# Altium PCB PCB.PcbDoc
Units mil, origin at the board's own origin, x right, y up, seen from the top; angles counter-clockwise.
Board outline 1574.8 x 2165.35 mil, 2 copper layers (Top Layer, Bottom Layer); 11 components, 17 nets, 47 pads, 22 vias.
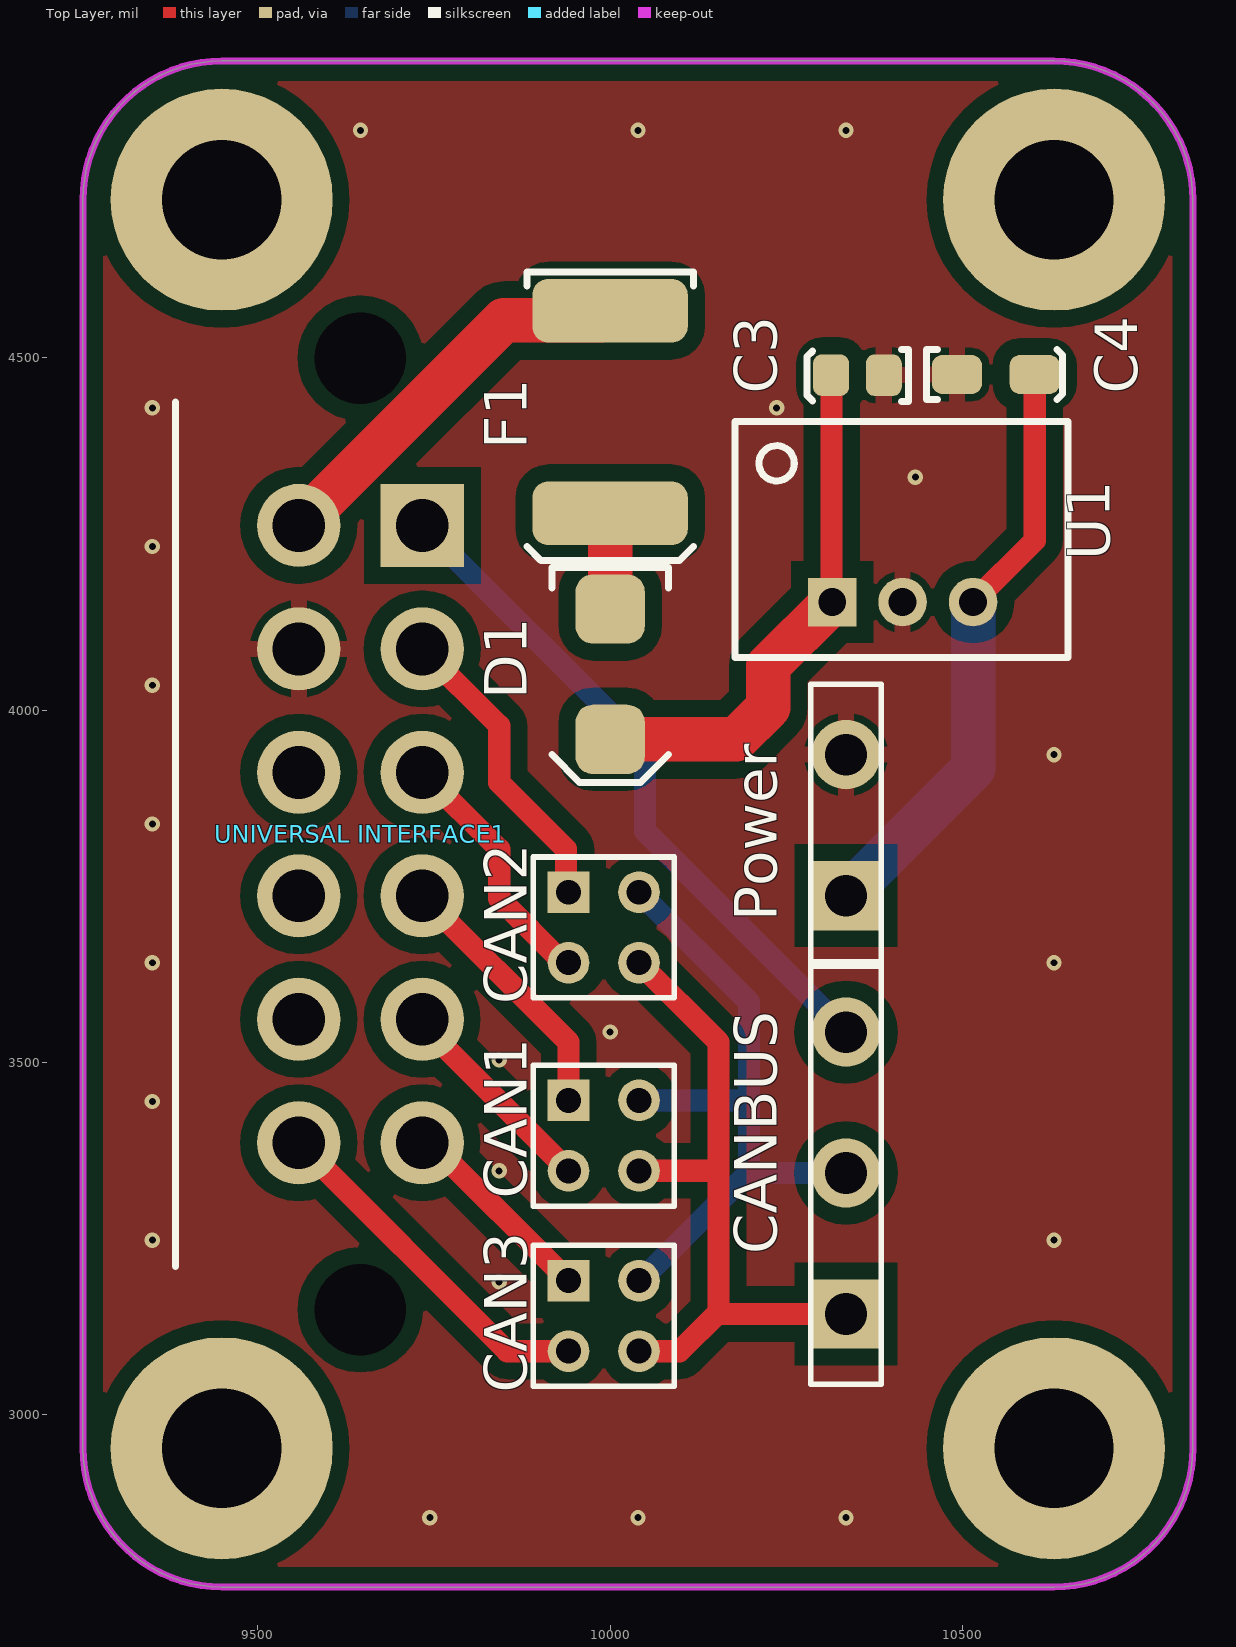
[diagram p0: Top Layer view]
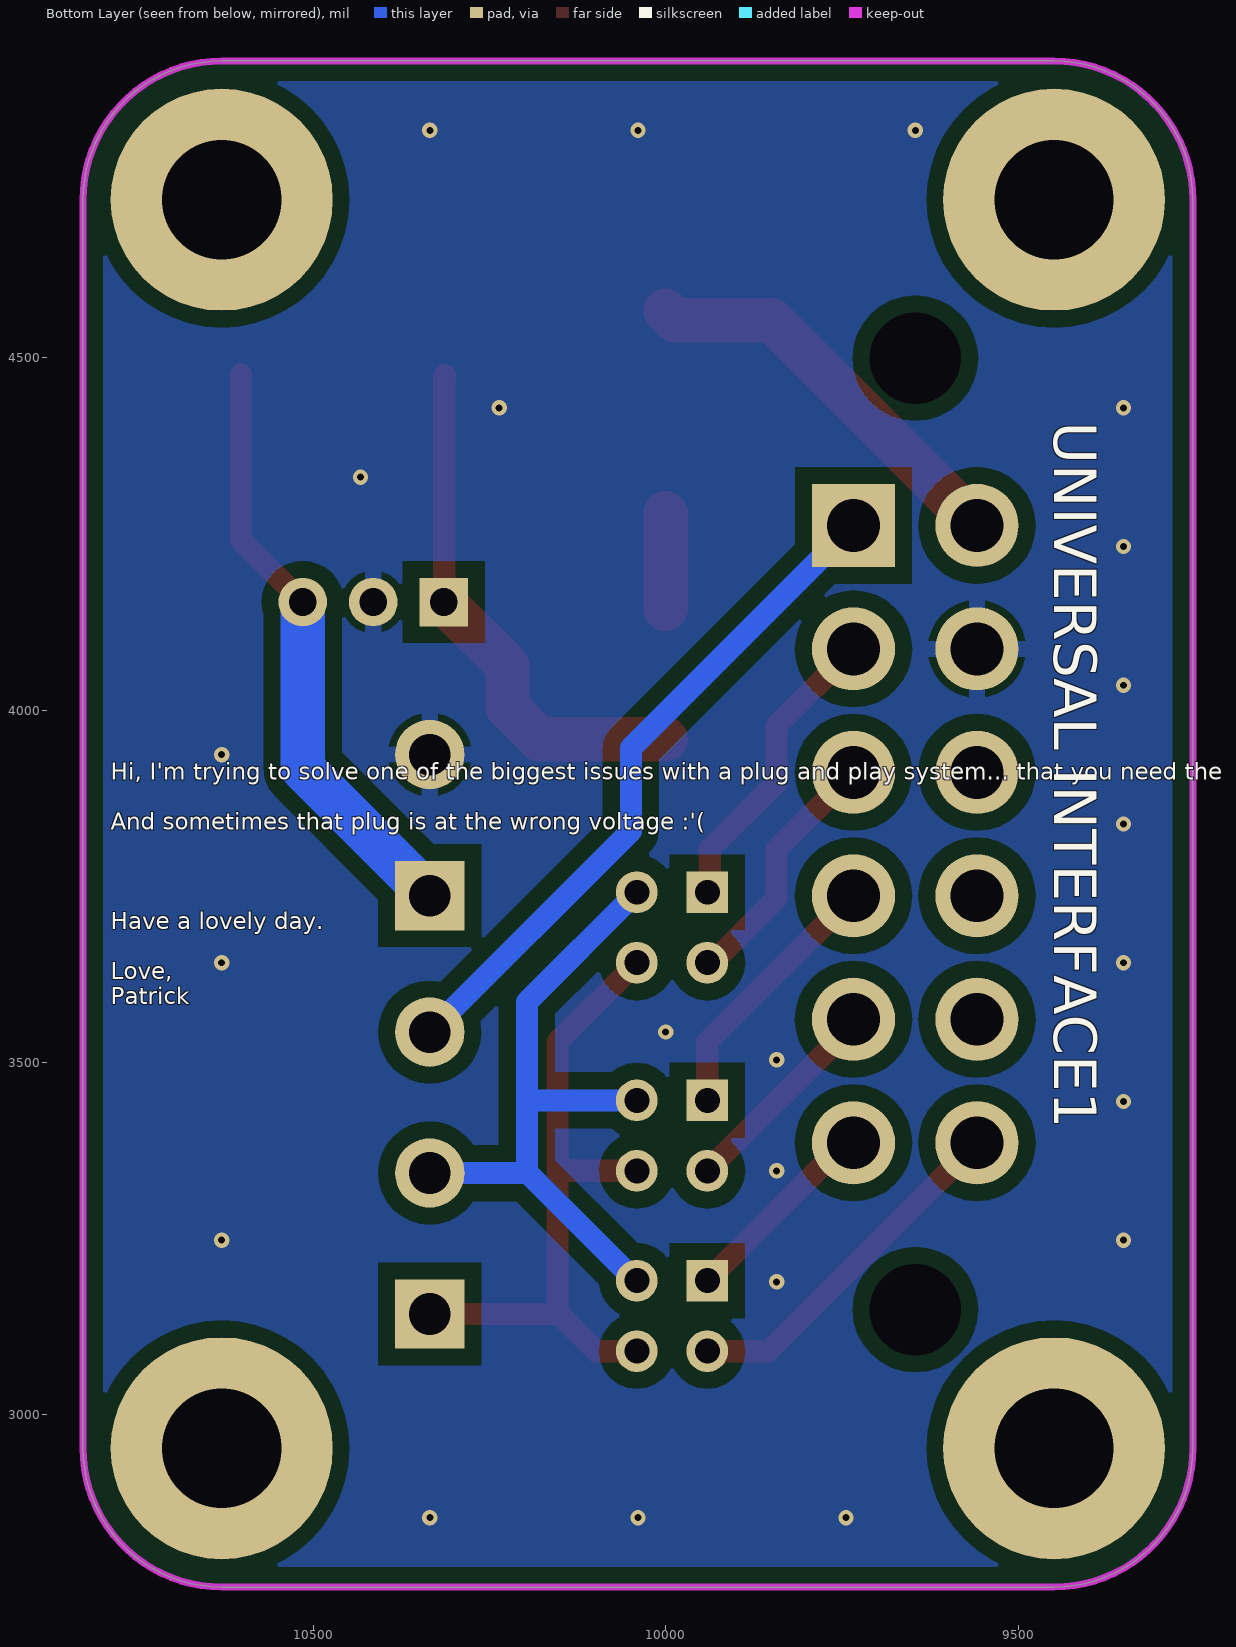
[diagram p1: Bottom Layer view, seen from below]

## Layer stack, top to bottom
Top Solder: solder mask 0.4, Solder Resist, Dk 3.5
Top Layer: signal copper 1.4
Dielectric 1: dielectric 12.6, FR-4, Dk 4.8
Bottom Layer: signal copper 1.4
Bottom Solder: solder mask 0.4, Solder Resist, Dk 3.5

## Board outline
9251.97,2952.76 9251.97,4724.41 cw(c9448.82,4724.41) 9448.82,4921.26 10629.92,4921.26 cw(c10629.92,4724.41) 10826.77,4724.41 10826.77,2952.76 cw(c10629.92,2952.76) 10629.92,2755.91 9448.82,2755.91 cw(c9448.82,2952.76)

## Design rules (kind name [scope] priority, off if disabled: settings)
Clearance [All] p1: gap=10 ignorepadtopadclearanceinfootprint=FALSE except(0: Arc-Hole Track-Hole SMDPad-Hole THPad-Hole Via-Hole Fill-Hole Poly-Hole Region-Hole Text-Hole; 3.94: THPad-THPad; 6: Arc-SMDPad Track-SMDPad SMDPad-SMDPad; 7.87: Arc-THPad Track-THPad SMDPad-THPad THPad-Via; 8: Arc-Arc Arc-Track Arc-Region Track-Track Track-Region SMDPad-Region THPad-Region Via-Region Fill-Region Poly-Region Region-Region; 23.62: Arc-Poly Track-Poly SMDPad-Poly THPad-Poly Via-Poly Fill-Poly Poly-Poly)
Height [All] p1: minheight=0 maxheight=1968.5 prefheight=500
HoleSize [All] p1: absolutevalues=TRUE maxlimit=393.7 minlimit=1 maxpercent=80.000 minpercent=20.000
PlaneClearance [All] p1: clearance=15.75
PlaneConnect [All] p1: pad.planeconnectstyle=Relief pad.reliefexpansion=20 pad.reliefentries=4 pad.reliefconductorwidth=31.5 pad.reliefairgap=10 via.planeconnectstyle=Direct via.reliefexpansion=20 via.reliefentries=4 via.reliefconductorwidth=31.5 via.reliefairgap=10
PolygonConnect [All] p1: thpad.connectstyle=Relief thpad.reliefconductorwidth=23.62 thpad.reliefentries=4 thpad.polygonreliefangle="90 Angle" thpad.airgapwidth=10 smdpad.connectstyle=Relief smdpad.reliefconductorwidth=23.62 smdpad.reliefentries=4 smdpad.polygonreliefangle="90 Angle" smdpad.airgapwidth=10 via.connectstyle=Direct via.reliefconductorwidth=23.62 via.reliefentries=4 via.polygonreliefangle="90 Angle" via.airgapwidth=10
RoutingVias [All] p1: holewidth=28 width=50 viastyle="Through Hole" minholewidth=8 minwidth=10 maxholewidth=28 maxwidth=50
SolderMaskExpansion [All] p1: expansion=2
Width [All] p1: maxlimit=118.11 minlimit=5 preferedwidth=19.68
26 further rules are at their usual default settings.

## Components (designator, comment, footprint, x,y, rotation, side; value= is the part's Value field where it differs from the comment)
C3 "10uF" 0805 10350.39,4474.41 r180 top
C4 "22uF" 1206 10594.49,4476.38 r0 top
CAN1 "2.54mm" "TH 2.54mm Header 2x2" 9940.94,3446.46 r270 top
CAN2 "2.54mm" "TH 2.54mm Header 2x2" 9940.94,3741.73 r270 top
CAN3 "2.54mm" "TH 2.54mm Header 2x2" 9940.94,3190.55 r270 top
CANBUS "5.08mm" "TH 5.08mm Header 1x3" 10334.65,3143.31 r90 top
D1 "SD560BTR" "SMB Diode" 10000,4133.86 r270 top
F1 "0ZCF0100AF2A" 2920 10000,4566.93 r270 top
Power "5.08mm" "TH 5.08mm Header 1x2" 10334.65,3737.01 r90 top
U1 "R-78C5.0-1.0" "RECOM 3-SIP" 10314.96,4153.54 r0 top
"UNIVERSAL INTERFACE1" "DTF13-12P" DTF13-12P 9558.27,3824.61 r270 top

## Footprints (in the part's own frame and the unit in brackets; to place one, negate y for a bottom-side part, rotate by r counter-clockwise, add the part's x,y. Pads: shape width x height; smd on the part's side, far side on the other; paste and mask are expansions set on the pad)
0805 [mil]
  rrect50% 51.18x59.06 smd: 1(-37.87,-1.03) 2(36.93,-1.03)
  silkscreen extent -73,-37 71,37, body extent -39,-26 39,26, height 29
1206 [mm]
  rrect50% 1.8x1.4 smd: 1(-2.6,0) 2(0.2,0)
  silkscreen extent -3.7,-0.9 1.2,0.9, body extent -2.9,-0.9 0.5,0.9, height 1.85
2920 [mm]
  rrect50% 2.3x5.6 smd: 1(0,0) 2(7.3,0)
  silkscreen extent -1.4,-3 9,3, body extent -0.34,-2.81 7.64,2.81, height 1.14
DTF13-12P [mm]
  round 3 hole 3.3 unplated: 0(-17.145,2.22) 0(17.145,2.22)
  rect 3x3 hole 1.9: 1(-11.114,4.45)
  round 3 hole 1.9: 2(-6.664,4.45) 3(-2.214,4.45) 4(2.236,4.45) 5(6.686,4.45) 6(11.136,4.45) 7(11.136,0) 8(6.686,0) 9(2.236,0) 10(-2.214,0) 11(-6.664,0) 12(-11.114,0)
  silkscreen extent -15.56,-4.45 15.59,-4.45, body extent -20.79,-27.74 20.79,6.55, height 23.13
"RECOM 3-SIP" [mm] "12 to 42 Vdc In, 9 Vdc Out"
  rect 1.75x1.75 hole 1: 1(0,0)
  round 1.75 hole 1: 2(2.54,0) 3(5.08,0)
  silkscreen extent -3.5,-2 8.5,6.5, body extent -3.26,-2.02 8.34,6.48, height 11.41
"SMB Diode" [mm]
  rrect50% 2.5x2.5 smd: A(-0.25,0) K(4.45,0)
  silkscreen extent -1.75,-2.1 6,2.1, body extent -0.69,-1.97 4.9,1.97, height 2.5
"TH 2.54mm Header 2x2" [mm]
  rect 1.5x1.5 hole 0.9: 1(0,0)
  round 1.5 hole 0.9: 2(0,2.54) 3(2.54,0) 4(2.54,2.54)
  silkscreen extent -1.27,-1.27 3.81,3.81, body extent -1.27,-1.27 3.81,3.81, height 9.5
"TH 5.08mm Header 1x2" [mm]
  rect 2.5x2.5 hole 1.5: 1(0,0)
  round 2.5 hole 1.5: 2(5.08,0)
  silkscreen extent -2.54,-1.27 7.62,1.27, body extent -2.54,-3.98 7.61,4.02, height 10
"TH 5.08mm Header 1x3" [mm]
  rect 2.5x2.5 hole 1.5: 1(0,0)
  round 1.8 hole 1.2: 2(5.08,0)
  round 2.5 hole 1.5: 2(5.08,0) 3(10.16,0)
  silkscreen extent -2.54,-1.27 12.7,1.27, body extent -2.57,-4 12.58,4, height 10

## Part data
C3: library part GRM21BR6YA106KE43L, Digikey Part Number=490-10514-6-ND, Manufacturer=muRata, Rated Voltage=50V, Tolerance=10%, Material=X5R, Part Number=GRM21BR6YA106KE43L
C4: library part CC1206MKX5R7BB226, Digikey Part Number=311-1997-2-ND, Manufacturer=YAGEO, Rated Voltage=16V, Tolerance=20%, Material=Ceramic, Part Number=CC1206MKX5R7BB226
CAN1 CAN2 CAN3: library part "TH 2.54mm Header 2x2", Angle=0, Contact=NA, Flange=No, Part Number="TH 2.54mm Header 2x2", Pitch=2.54mm, Positions=4, Row Spacing=2.54mm
CANBUS: library part 1760520000, Digikey Part Number=281-1883-ND, Angle=0, Contact=NA, Digikey Link=https://www.digikey.com.au/product-detail/en/weidm%C3%BCller/1760520000/281-1883-ND/459740, Flange=No, Part Number=1760520000, Pitch=5.08mm, Positions=3, Row Spacing=0
D1: "1.2V_F 600V 5A SMB", Digikey Part Number=1655-1530-2-ND, Manufacturer="SMC Diode Solutions", Digikey Link=https://www.digikey.com/product-detail/en/smc-diode-solutions/SD560BTR/1655-1530-2-ND/6022620, Part Number=SD560BTR
F1: "PTC RESET FUSE 60V 1A 292", Digikey Part Number=507-2070-1-ND, Manufacturer="Littelfuse Inc.", Digikey Link=https://www.digikey.com/product-detail/en/bel-fuse-inc/0ZCF0100AF2A/507-2070-1-ND/6210547, Part Number=0ZCF0100AF2A
Power: library part 1760510000, Digikey Part Number=281-1882-ND, Angle=0, Contact=NA, Digikey Link=https://www.digikey.com.au/product-detail/en/weidm%C3%BCller/1760510000/281-1882-ND/459739, Flange=No, Part Number=1760510000, Pitch=5.08mm, Positions=2, Row Spacing=0
U1: "CONV DC/DC 1A 5V OUT SIP VERT", Digikey Part Number=945-1395-5-ND, Manufacturer=Recom, Digikey Link=https://www.digikey.com.au/product-detail/en/recom-power/R-78C5.0-1.0/945-1395-5-ND/2652148, Isolation=Non-Isolated, Part Number=R-78C5.0-1.0
"UNIVERSAL INTERFACE1": library part DTF13-12P[[/\]]DTF13-12P, Digikey Part Number=1734-1861-ND, Angle=90, Contact="Copper Alloy", Digikey Link=https://www.digikey.com/products/en?keywords=dtf13-12pa, Flange=No, Part Number=DTF13-12P, Pitch=4.45mm, Positions=12, Row Spacing=4.45mm

## Free pads (board coordinates)
  round 314.96 hole 169.29 unplated: 0(9448.82,2952.76) 0(9448.82,4724.41) 0(10629.92,2952.76) 0(10629.92,4724.41)

## Via types
v1: diameter 21.65, hole 9.84, Top Layer to Bottom Layer, 22 vias

## Nets (pads, with @x,y where several pads share a name; then routed paths per layer and width w, separated by ;. In a path a pad name is that pad's centre, name@x,y a point inside that pad or via, vN(x,y) a via of type N, cw(c..) or ccw(c..) an arc to the next point about the centre after c; other vN are vias at no path point)
5kW: "UNIVERSAL INTERFACE1.8"
5V: C4.2 Power.1 U1.3 | length 850.3
  Top Layer w31.5: U1.3 10602.36,4240.94 C4.2
  Bottom Layer w62.99: Power.1 10514.96,3917.32 U1.3
12V/24V: C3.2 D1.K U1.1 | length 752.8
  Top Layer w31.5: C3.2 10314.21,4474.69 10314.21,4154.29 U1.1
  Top Layer w62.99: D1.K 10179.13,3958.66 10224.35,4003.88 10224.35,4062.93 U1.1
CAN1H: "UNIVERSAL INTERFACE1.5" CAN1.3 | length 300.9
  Top Layer w31.5: 9733.46,3561.38 9733.46,3553.94 CAN1.3
CAN1L: "UNIVERSAL INTERFACE1.4" CAN1.1 | length 376.1
  Top Layer w31.5: 9733.46,3736.57 9940.94,3529.09 CAN1.1
CAN2H: "UNIVERSAL INTERFACE1.3" CAN2.3 | length 360.3
  Top Layer w31.5: 9733.46,3911.77 9842.52,3802.72 9842.52,3732.7 9933.49,3641.73 CAN2.3
CAN2L: "UNIVERSAL INTERFACE1.2" CAN2.1 | length 431.2
  Top Layer w31.5: 9733.46,4086.97 9842.52,3977.91 9842.52,3897.64 9937.4,3802.76 9937.4,3745.28 CAN2.1
CAN3H: "UNIVERSAL INTERFACE1.7" CAN3.3 | length 505.1
  Top Layer w31.5: 9558.27,3386.18 9853.9,3090.55 CAN3.3
CAN3L: "UNIVERSAL INTERFACE1.6" CAN3.1 | length 288.5
  Top Layer w31.5: 9733.46,3386.18 9745.31,3386.18 CAN3.1
CANH: CAN1.4 CAN2.4 CAN3.4 CANBUS.1 | length 974.4
  Top Layer w31.5: CAN3.4 10098.43,3090.55 10153.54,3145.67 ; CAN1.4 10149.61,3346.46 10153.54,3350.39 ; CAN2.4 10153.54,3529.13 10153.54,3350.39 ; CANBUS.1 10155.91,3143.31 10153.54,3145.67 ; 10153.54,3145.67 10153.54,3350.39
CANL: CAN1.2 CAN2.2 CAN3.2 CANBUS.2 | length 976.7
  Bottom Layer w31.5: CAN3.2 10042.91,3190.55 10196.85,3344.49 ; CAN1.2 10194.49,3446.46 10196.85,3448.82 ; CAN2.2 10196.85,3585.83 10196.85,3448.82 ; CANBUS.2@10334.65,3343.31 10198.03,3343.31 10196.85,3344.49 ; 10196.85,3344.49 10196.85,3448.82
CANS: "UNIVERSAL INTERFACE1.1" CANBUS.3 | length 967.9
  Bottom Layer w31.5: 9733.46,4262.17 10049.31,3946.32 10049.31,3828.65 CANBUS.3
GLV+: "UNIVERSAL INTERFACE1.12" F1.1 | length 568
  Top Layer w62.99: 9558.27,4262.17 9849.25,4553.15 9986.22,4553.15 F1.1
GLV-: "UNIVERSAL INTERFACE1.11" C3.1 C4.1 Power.2 U1.2
  other v1: 9744.09,2854.33 10039.37,2854.33 10334.65,2854.33 9842.52,3188.98 9350.39,3248.03 10629.92,3248.03 9842.52,3346.46 9350.39,3444.88 9842.52,3503.94 10000,3543.31 9350.39,3641.73 10629.92,3641.73 9350.39,3838.58 10629.92,3937.01 9350.39,4035.43 9350.39,4232.28 10433.07,4330.71 9350.39,4429.13 10236.22,4429.13 9645.67,4822.83 10039.37,4822.83 10334.65,4822.83
"Green In": "UNIVERSAL INTERFACE1.10"
"Green Out": "UNIVERSAL INTERFACE1.9"
NetD1_A: D1.A F1.2 | length 135.8
  Top Layer w62.99: D1.A F1.2
pads on no net: "UNIVERSAL INTERFACE1.0"

## Polygon pours and split planes (outlines as drawn)
no net on Drill Drawing (solid): 9251.97,4921.26
GLV- on Bottom Layer (solid, remove dead copper, pour order 2): 9251.97,4921.26 10826.77,4921.26 10826.77,2755.91 9251.97,2755.91
GLV- on Top Layer (solid, remove dead copper, pour order 0): 9251.97,4921.26 10826.77,4921.26 10826.77,2755.91 9251.97,2755.91

## Keep-outs
Keep-Out Layer:
  the board outline again, w10

## Silkscreen, mask and mechanical layers (free items; w line width, h text height)
Bottom Overlay:
  text "Hi, I'm trying to solve one of the biggest issues with a plug and play system... that you need the plug :'( /  / And sometimes that plug is at the wrong voltage :'( /  / Whilst it says 5V, Recom make quite a few of these little regulators, so you could probs switch them out pretty easy. Didn't want to put a buck  - regulator on here because that could - get a bit dicey if someone wiggles the car too much, but this should do the job.  /  / Have a lovely day. /  / Love, / Patrick" at 10787.4,3582.68 h23.62
Drill Drawing:
  text "FABRICATION NOTES" at 11175.65,5209.6 h118.11
  text "1. QUANTITY: 5" at 11175.65,5008.95 h118.11
  text "2. SIZE:" at 11175.65,4808.3 h118.11
  text "3. LAYERS: 2" at 11175.65,4607.66 h118.11
  text "4. SIGNAL LAYERS: 1,2" at 11175.65,4446.37 h118.11
  text "a) WEIGHT: 1oz" at 11372.5,4206.37 h118.11
  text "5. PLANES: NA" at 11165.65,3995.72 h118.11
  text "a) WEIGHT: NA" at 11372.5,3805.07 h118.11
  text "6. SOLDER MASKS: Can you do purple?" at 11175.65,3604.43 h118.11
  text "7. SILKSCREEN: White" at 11175.65,3403.78 h118.11
  text "8. SURFACE FINISH: HASL (With Lead)" at 11175.65,3203.14 h118.11
  text "9 FINISHED COPPER: 1oz Cu" at 11175.65,3002.49 h118.11
  text "10. TOTAL THICKNESS: 1.6mm" at 11175.65,2801.84 h118.11

## Dimensions
9448.82,4724.41 to 9015.75,5118.11 on Drill Drawing
9448.82,4921.26 to 9448.82,2755.91 on Drill Drawing
9251.97,4724.41 to 10826.77,4724.41 on Drill Drawing